# Altium PCB LCD_VGA.PcbDoc
Units mil, origin at the board's own origin, x right, y up, seen from the top; angles counter-clockwise.
Board outline 6000 x 4000 mil, 2 copper layers (Top Layer, Bottom Layer); 29 components, 38 nets, 119 pads, 103 vias.
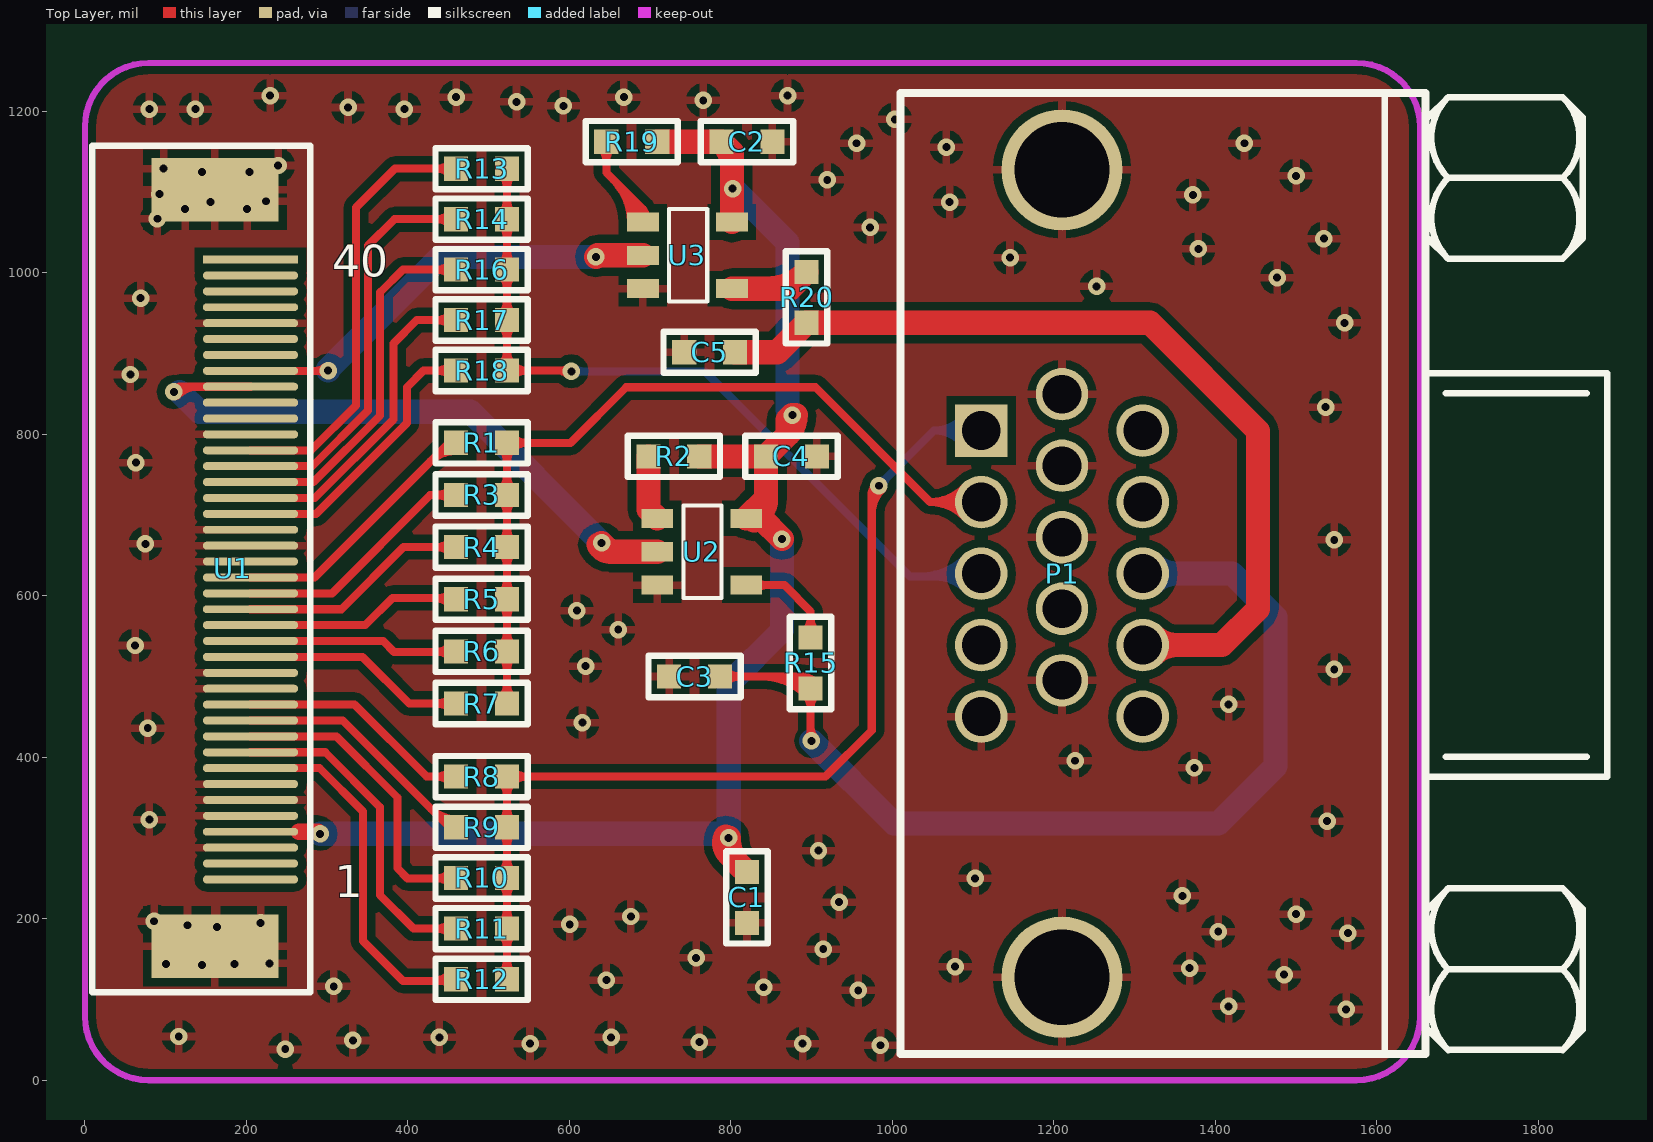
[diagram p0: Top Layer view]
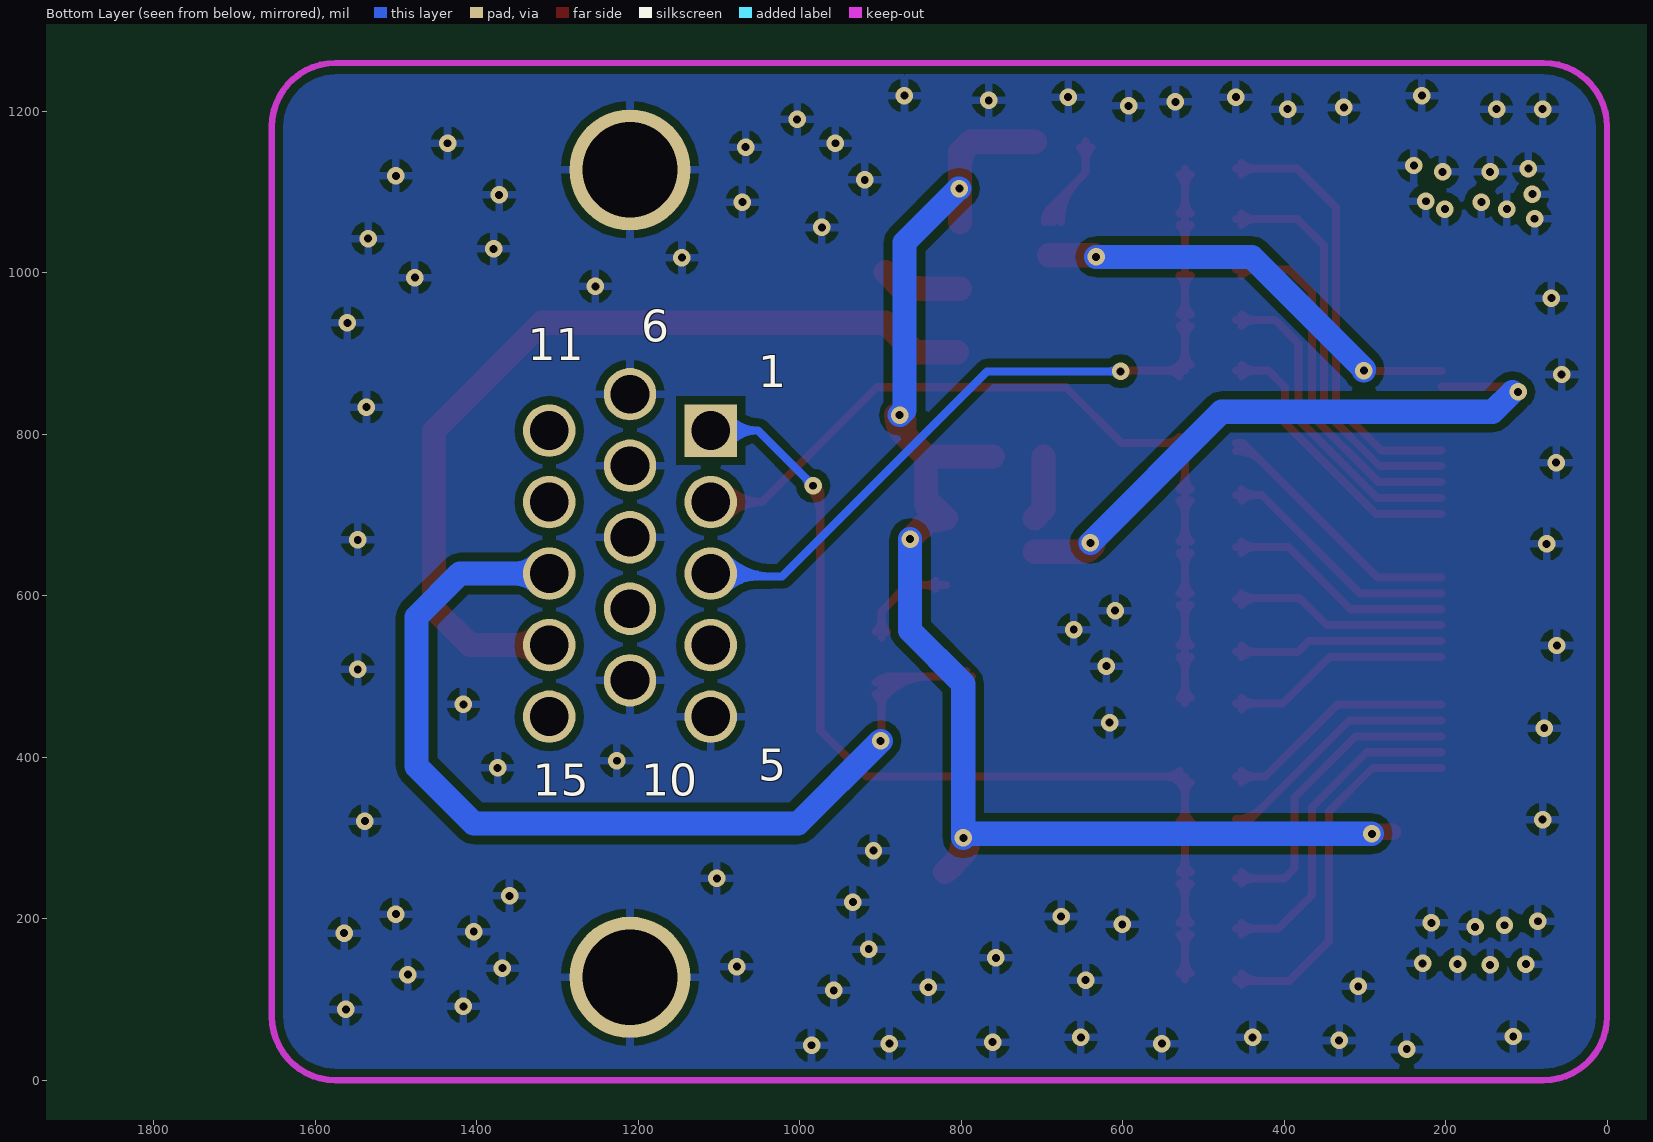
[diagram p1: Bottom Layer view, seen from below]

## Layer stack, top to bottom
Top Layer: signal copper 1.4
Dielectric: dielectric 12.6, FR-4, Dk 4.8
Bottom Layer: signal copper 1.4

## Board outline
-2274.76,-1366.34 3725.24,-1366.34 3725.24,2633.66 -2274.76,2633.66

## Design rules (kind name [scope] priority, off if disabled: settings)
Clearance [All] p1: gap=5
ComponentClearance [All] p1: gap=1 collisioncheckmode=3 verticalgap=1 showdistances=FALSE
HoleSize [All] p1: absolutevalues=TRUE maxlimit=196.85 minlimit=1 maxpercent=80.000 minpercent=20.000
HoleToHoleClearance [All] p1: gap=0 allowstackedmicrovias=TRUE
MinimumSolderMaskSliver [All] p1: minsoldermaskwidth=0
PolygonConnect [All] p1: connectstyle=Relief reliefconductorwidth=10 reliefentries=4 polygonreliefangle="90 Angle" airgapwidth=10
RoutingVias [All] p1: holewidth=9.84 width=21.65 viastyle="Through Hole" minholewidth=9.84 minwidth=21.65 maxholewidth=28 maxwidth=50
SilkToSilkClearance [All] p1: silktosilkclearance=0
SilkToSolderMaskClearance [IsPad] p1: minsilkscreentomaskgap=0 clearancetoexposedcopper=TRUE
SolderMaskExpansion [All] p1: expansion=4
Width [All] p1: maxlimit=100 minlimit=5 preferedwidth=5 minimp=50.000000 maximp=50.000000 favimp=50.000000
22 further rules are at their usual default settings.

## Components (designator, comment, footprint, x,y, rotation, side; value= is the part's Value field where it differs from the comment)
C1 "C10uF" 0603C 819.88,257.87 r270 top
C2 "104" 0603C 851.38,1162.4 r180 top
C3 "5PF" 0603C 786.42,500 r180 top
C4 "104" 0603C 906.5,772.64 r180 top
C5 "5PF" 0603C 805.12,901.57 r180 top
P1 "VGA" VGA-DB15 1110.04,804.65 r0 top locked
R1 "499R" 0603R 522.64,789.37 r180 top
R2 "8.06K" 0603R 760.83,772.64 r180 top
R3 "1K" 0603R 522.64,724.8 r180 top
R4 "2K" 0603R 522.64,660.24 r180 top
R5 "4.02K" 0603R 522.64,595.67 r180 top
R6 "8.06K" 0603R 522.64,531.1 r180 top
R7 "16K" 0603R 522.64,466.54 r180 top
R8 "499R" 0603R 522.64,375.98 r180 top
R9 "1K" 0603R 522.64,313.24 r180 top
R10 "2K" 0603R 522.64,250.49 r180 top
R11 "4.02K" 0603R 522.64,187.75 r180 top
R12 "8.06K" 0603R 522.64,125 r180 top
R13 "499R" 0603R 522.64,1128.86 r180 top
R14 "1K" 0603R 522.64,1066.38 r180 top
R15 "22R" 0603R 898.62,485.24 r90 top
R16 "2K" 0603R 522.64,1003.9 r180 top
R17 "4.02K" 0603R 522.64,941.42 r180 top
R18 "8.06K" 0603R 522.64,878.94 r180 top
R19 "8.06K" 0603R 708.66,1162.4 r180 top
R20 "22R" 0603R 893.7,937.99 r90 top
U1 "AT043TN24" FPC40-N 205,248.66 r180 top locked
U2 "74LVC1G126" SOT23-5 708.66,695.87 r270 top
U3 "74LVC1G126" SOT23-5 690.95,1062.99 r270 top

## Footprints (in the part's own frame and the unit in brackets; to place one, negate y for a bottom-side part, rotate by r counter-clockwise, add the part's x,y. Pads: shape width x height; smd on the part's side, far side on the other; paste and mask are expansions set on the pad)
0603C [mil]
  rect 30x30 smd: 1(0,0) 2(62.99,0)
  silkscreen extent -26,-26 89,26
0603R [mil]
  rect 30x30 smd: 1(0,0) 2(62.99,0)
  silkscreen extent -26,-26 89,26
FPC40-N [mm]
  rect 4x2 smd: 0(1.12,2.104) 0(1.12,-21.695)
  oval 3x0.25 smd: 1(0,0) 2(0,-0.5) 3(0,-1) 4(0,-1.5) 5(0,-2) 6(0,-2.5) 7(0,-3) 8(0,-3.5) 9(0,-4) 10(0,-4.5) 11(0,-5) 12(0,-5.5) 13(0,-6) 14(0,-6.5) 15(0,-7) 16(0,-7.5) 17(0,-8) 18(0,-8.5) 19(0,-9) 20(0,-9.5) 21(0,-10) 22(0,-10.5) 23(0,-11) 24(0,-11.5) 25(0,-12) 26(0,-12.5) 27(0,-13) 28(0,-13.5) 29(0,-14) 30(0,-14.5) 31(0,-15) 32(0,-15.5) 33(0,-16) 34(0,-16.5) 35(0,-17) 36(0,-17.5) 37(0,-18) 38(0,-18.5) 39(0,-19)
  rect 3x0.25 smd: 40(0,-19.5)
  silkscreen extent -1.88,-23.08 4.97,3.55
SOT23-5 [mm]
  rect 0.6x1 smd: 1(0,0) 2(1.05,0) 3(2.1,0) 4(2.1,2.8) 5(0,2.8)
  silkscreen extent -0.4,0.82 2.5,2.02
VGA-DB15 [mil]
  rect 65x65 hole 48: 1(0,0)
  round 65 hole 48: 2(0,-88.58) 3(0,-177.17) 4(0,-265.75) 5(0,-354.33) 6(100,45) 7(100,-43.58) 8(100,-132.17) 9(100,-220.75) 10(100,-309.33) 11(200,0) 12(200,-88.58) 13(200,-177.17) 14(200,-265.75) 15(200,-354.33)
  round 150 hole 118.11: 16(100,322.83) 17(100,-677.17)
  silkscreen extent -100,-772 775,419

## Part data
C1 C2 C3 C4 C5: library part C10uF-B
R1 R2 R3 R4 R5 R6 R7 R8 R9 R10 R11 R12 R13 R14 R15 R16 R17 R18 R19 R20: library part R1M
U2 U3: library part 74LVC1G17

## Via types
v1: diameter 21.65, hole 9.84, Top Layer to Bottom Layer, 103 vias

## Nets (pads, with @x,y where several pads share a name; then routed paths per layer and width w, separated by ;. In a path a pad name is that pad's centre, name@x,y a point inside that pad or via, vN(x,y) a via of type N, cw(c..) or ccw(c..) an arc to the next point about the centre after c; other vN are vias at no path point)
3V3: C1.1 C2.2 C4.2 R2.1 R19.1 U1.4 U2.5 U3.5 | length 2047.6
  Top Layer w20: 264.76,307.72 288.74,307.72 v1(291.34,305.12)
  Top Layer w30: R19.1 C2.2 ; R2.1 C4.2 ; v1@793.07,300.2 ccw(c830.52,300.2) 804.04,273.72 ; v1@793.46,301.96 ccw(c810.67,293.94) 797.24,280.51 ; U3.5 801.18,1149.61 C2.2 ; 801.18,1131.51 ccw(c757.5,1131.51) C2.2 ; U2.5@826.77,699.06 cw(c826.77,680.62) 839.81,693.65 ; U2.5@828.48,693.17 ccw(c811.19,720.47) 843.5,720.47 ; U2.5@829.03,693.61 ccw(c794.07,728.56) 843.5,728.56 ; v1(863.19,670.28) 837.6,695.87 U2.5 843.5,720.47 ; 869.88,799.02 ccw(c845.08,823.82) v1@880.16,823.82 ; v1(875.98,823.82) 870.08,817.91 870.08,799.21 ; v1@880.16,823.86 cw(c845.75,823.55) 870.08,799.21 ; 797.24,280.51 C1.1 cw(c848.12,300.2) v1(797.24,300.2) 797.24,280.51 ; 843.5,720.47 C4.2 ; C4.2 870.08,799.21
  Bottom Layer w30: v1(291.34,305.12) 792.32,305.12 v1(797.24,300.2) 797.24,491.14 863.19,557.09 v1(863.19,670.28) ; v1(802.17,1104.33) 803.15,1104.33 870.08,1037.4 870.08,829.72 v1(875.98,823.82)
BLUE: P1.3 R13.1 R14.1 R16.1 R17.1 R18.1 | length 1506.6
  Top Layer w10: R18.1@515.57,886.01 ccw(c498.5,903.08) 522.64,903.08 ccw(c546.78,903.08) 529.71,886.01 ccw(c546.78,903.08) 546.78,878.94 ccw(c546.78,854.8) R18.1@529.71,871.87 ; R17.1@515.57,934.35 cw(c498.5,917.28) 522.64,917.28 cw(c546.78,917.28) R17.1@529.71,934.35 ; R17.1@515.57,948.49 ccw(c498.5,965.56) 522.64,965.56 ccw(c546.78,965.56) R17.1@529.71,948.49 ; R16.1@515.57,996.83 cw(c498.5,979.76) 522.64,979.76 cw(c546.78,979.76) R16.1@529.71,996.83 ; R16.1@515.57,1010.97 ccw(c498.5,1028.04) 522.64,1028.04 ccw(c546.78,1028.04) R16.1@529.71,1010.97 ; R14.1@515.57,1059.31 cw(c498.5,1042.24) 522.64,1042.24 cw(c546.78,1042.24) R14.1@529.71,1059.31 ; R14.1@515.57,1073.45 ccw(c498.5,1090.52) 522.64,1090.52 ccw(c546.78,1090.52) R14.1@529.71,1073.45 ; R13.1@515.57,1121.79 cw(c498.5,1104.72) 522.64,1104.72 cw(c546.78,1104.72) R13.1@529.71,1121.79 ; R13.1 R14.1 R16.1 R17.1 R18.1 600.39,878.94 603.35,881.89 603.35,878.94 v1(602.36,877.95) ; 585.92,878.94 cw(c585.92,861.51) v1@598.24,873.83 ; 590.67,878.94 ccw(c590.67,889.64) v1@598.24,882.07
  Bottom Layer w10: v1(602.36,877.95) 767.72,877.95 1021.65,624.02 1106.58,624.02 P1.3 ; v1@606.48,873.83 cw(c616.43,863.89) 616.43,877.95 cw(c616.43,892.02) v1@606.48,882.07 ; 1035.28,624.02 ccw(c1035.28,702.24) P1.3@1090.59,646.93 ; 1052.01,624.02 cw(c1052.01,569.46) P1.3@1090.59,608.04 ; 1059.43,624.02 ccw(c1059.43,678.09) P1.3@1097.67,639.86 ; 1076.16,624.02 cw(c1076.16,593.6) P1.3@1097.67,615.11
GND: C1.2 C2.1 C3.2 C4.1 C5.2 P1.5 P1.6 P1.7 P1.8 P1.10 P1.16 P1.17 U1.0 U1.3 U1.5 U1.6 U1.7 U1.13 U1.14 U1.21 U1.22 U1.23 U1.29 U1.36 U2.3 U3.3
  other v1: 248.03,38.39 985.24,43.31 551.18,45.28 888.78,45.28 760.83,47.24 331.69,49.21 438.98,53.15 651.57,53.15 116.14,54.13 1562.01,87.6 1416.34,91.54 957.68,111.22 840.55,115.16 308.07,116.14 645.67,124.02 1485.24,130.91 1368.11,138.78 1077.76,140.75 144.68,142.72 100.39,143.7 185.04,143.7 228.35,144.69 756.89,151.57 914.37,162.4 1563.98,182.09 1403.54,184.06 163.39,189.96 126.97,191.93 600.39,192.91 217.52,194.88 85.63,196.85 676.18,202.76 1500,205.71 934.06,220.47 1359.25,228.35 1102.36,250 908.46,284.45 1538.39,320.87 79.72,322.83 1374.02,386.81 1226.38,395.67 77.76,436.02 616.14,442.91 1416.34,465.55 1547.24,508.86 620.08,512.8 62.01,538.39 660.43,558.07 609.25,581.69 74.8,664.37 1547.24,669.29 62.99,764.76 1536.42,833.66 56.1,874.02 1560.04,937.99 68.9,968.5 1252.95,983.27 1476.38,994.09 1145.67,1018.7 1378.94,1029.53 1534.45,1042.32 972.44,1056.1 89.57,1066.93 124.02,1078.74 200.79,1078.74 155.51,1087.6 1070.87,1087.6 224.41,1088.58 1372.05,1096.46 92.52,1097.44 919.29,1115.16 1500,1120.08 144.68,1125 203.74,1125 97.44,1128.94 239.17,1132.87 1066.93,1155.51 955.71,1160.43 1436.02,1160.43 1002.95,1189.96 79.72,1202.76 136.81,1202.76 395.67,1202.76 325.79,1204.72 592.52,1206.69 534.45,1211.61 765.75,1213.58 459.65,1217.52 667.32,1217.52 229.33,1219.49 870.08,1219.49
GREEN: P1.2 R1.1 R3.1 R4.1 R5.1 R6.1 R7.1 | length 1573.4
  Top Layer w10: R7.1@515.57,473.61 ccw(c498.5,490.68) 522.64,490.68 ccw(c546.78,490.68) R7.1@529.71,473.61 ; R6.1@515.57,524.03 cw(c498.5,506.96) 522.64,506.96 cw(c546.78,506.96) R6.1@529.71,524.03 ; R6.1@515.57,538.17 ccw(c498.5,555.24) 522.64,555.24 ccw(c546.78,555.24) R6.1@529.71,538.17 ; R5.1@515.57,588.6 cw(c498.5,571.53) 522.64,571.53 cw(c546.78,571.53) R5.1@529.71,588.6 ; R5.1@515.57,602.74 ccw(c498.5,619.81) 522.64,619.81 ccw(c546.78,619.81) R5.1@529.71,602.74 ; R4.1@515.57,653.17 cw(c498.5,636.09) 522.64,636.09 cw(c546.78,636.09) R4.1@529.71,653.17 ; R4.1@515.57,667.31 ccw(c498.5,684.38) 522.64,684.38 ccw(c546.78,684.38) R4.1@529.71,667.31 ; R3.1@515.57,717.73 cw(c498.5,700.66) 522.64,700.66 cw(c546.78,700.66) R3.1@529.71,717.73 ; R3.1@515.57,731.87 ccw(c498.5,748.95) 522.64,748.95 ccw(c546.78,748.95) R3.1@529.71,731.87 ; R1.1@515.57,782.3 cw(c498.5,765.23) 522.64,765.23 cw(c546.78,765.23) 529.71,782.3 cw(c546.78,765.23) 546.78,789.37 cw(c546.78,813.51) R1.1@529.71,796.44 ; R7.1 R6.1 R5.1 R4.1 R3.1 R1.1 601.38,789.37 670.28,858.27 904.53,858.27 1046.73,716.06 ; P1.2@1089.94,697.29 ccw(c1046.73,656.95) 1046.73,716.06 ; P1.2@1089.94,734.83 cw(c1046.73,775.18) 1046.73,716.06 ; P1.2@1097.25,704.12 ccw(c1069.75,678.44) 1069.75,716.06 ccw(c1069.75,753.68) P1.2@1097.25,728.01 ; P1.2 1046.73,716.06
LCD-B3: R18.2 U1.24 | length 392
  Top Layer w10: U1.24 286.06,701.42 398.62,813.98 398.62,858.27 419.29,878.94 R18.2 ; R18.2@452.58,871.87 ccw(c435.5,854.8) 435.5,878.94 ccw(c435.5,903.08) R18.2@452.58,886.01
LCD-B4: R17.2 U1.25 | length 438.9
  Top Layer w10: U1.25 284.53,721.1 381.89,818.46 381.89,912.4 410.91,941.42 R17.2 ; R17.2@452.58,934.35 ccw(c435.5,917.28) 435.5,941.42 ccw(c435.5,965.56) R17.2@452.58,948.49
LCD-B5: R16.2 U1.26 | length 490.9
  Top Layer w10: U1.26 283.01,740.79 365.63,823.41 365.63,975.87 393.66,1003.9 R16.2 ; R16.2@452.58,996.83 ccw(c435.5,979.76) 435.5,1003.9 ccw(c435.5,1028.04) R16.2@452.58,1010.97
LCD-B6: R14.2 U1.27 | length 538.8
  Top Layer w10: U1.27 281.48,760.47 350.63,829.62 350.63,1033.7 383.31,1066.38 R14.2 ; R14.2@452.58,1059.31 ccw(c435.5,1042.24) 435.5,1066.38 ccw(c435.5,1090.52) R14.2@452.58,1073.45
LCD-B7: R13.2 U1.28 | length 580.5
  Top Layer w10: U1.28 279.95,780.16 335.63,835.84 335.63,1080.71 383.86,1128.94 459.57,1128.94 R13.2 ; 435.31,1128.94 cw(c435.31,1104.53) R13.2@452.58,1121.79 ; 435.69,1128.94 ccw(c435.69,1152.81) R13.2@452.58,1135.93
LCD-DEN: U1.34
LCD-G2: R7.2 U1.15 | length 316.5
  Top Layer w10: U1.15 343.86,524.25 401.57,466.54 R7.2 ; R7.2@452.58,459.46 ccw(c435.5,442.39) 435.5,466.54 ccw(c435.5,490.68) R7.2@452.58,473.61
LCD-G3: R6.2 U1.16 | length 298.4
  Top Layer w10: U1.16 369.45,543.94 382.87,530.51 459.06,530.51 R6.2 ; 434.08,530.51 ccw(c434.08,556.67) R6.2@452.58,538.17 ; 436.93,530.51 cw(c436.93,508.39) R6.2@452.58,524.03
LCD-G4: R5.2 U1.17 | length 307.3
  Top Layer w10: U1.17 347.09,563.62 380.91,597.44 457.87,597.44 R5.2 ; 431.23,597.44 cw(c431.23,567.25) R5.2@452.58,588.6 ; 439.78,597.44 ccw(c439.78,615.54) R5.2@452.58,602.74
LCD-G5: R4.2 U1.18 | length 324.4
  Top Layer w10: U1.18 317.56,583.31 394.49,660.24 R4.2 ; R4.2@452.58,653.17 ccw(c435.5,636.09) 435.5,660.24 ccw(c435.5,684.38) R4.2@452.58,667.31
LCD-G6: R3.2 U1.19 | length 343
  Top Layer w10: U1.19 305.75,602.99 427.56,724.8 R3.2 ; R3.2@452.58,717.73 ccw(c435.5,700.66) 435.5,724.8 ccw(c435.5,748.95) R3.2@452.58,731.87
LCD-G7: R1.2 U1.20 | length 376.2
  Top Layer w10: U1.20 284.09,622.68 450.79,789.37 R1.2 ccw(c459.65,767.98) 444.52,783.11 ; 427.45,766.04 cw(c459.65,733.84) R1.2@459.65,779.37
LCD-HSYNC: U1.32 U2.2 | length 838.6
  Top Layer w10: v1(110.24,852.36) 116.77,858.9 U1.32 ; v1@114.36,848.24 cw(c140.08,822.52) 140.08,858.9
  Top Layer w30: v1@636.04,663.47 ccw(c650.59,670.84) 650.59,654.53 ; v1@636.81,662.4 ccw(c655.83,681.42) 655.83,654.53 ; v1(639.76,665.35) 650.59,654.53 ; U2.2 650.59,654.53
  Bottom Layer w30: v1@117.13,852.36 141.73,827.76 477.36,827.76 v1(639.76,665.35)
LCD-ONOFF: U1.31
LCD-PCLK: U1.30
LCD-R3: R12.2 U1.8 | length 496.5
  Top Layer w10: U1.8 290.71,386.46 344.49,332.68 344.49,172.24 393.7,123.03 457.68,123.03 R12.2 ; 430.75,123.03 ccw(c430.75,153.89) R12.2@452.58,132.07 ; 440.26,123.03 cw(c440.26,105.61) R12.2@452.58,117.93
LCD-R4: R11.2 U1.9 | length 447
  Top Layer w10: U1.9 297.6,406.14 365.16,338.58 365.16,229.33 406.74,187.75 R11.2 ; R11.2@452.58,180.67 ccw(c435.5,163.6) 435.5,187.75 ccw(c435.5,211.89) R11.2@452.58,194.82
LCD-R5: R10.2 U1.10 | length 416.9
  Top Layer w10: U1.10 311.38,425.83 386.81,350.39 386.81,262.8 399.61,250 459.15,250 R10.2 ; 434.32,250 ccw(c434.32,275.82) R10.2@452.58,257.56 ; 436.69,250 cw(c436.69,227.54) R10.2@452.58,243.42
LCD-R6: R9.2 U1.11 | length 343.8
  Top Layer w10: U1.11 319.25,445.51 451.53,313.24 R9.2 ; 428.71,336.05 ccw(c459.65,366.98) R9.2@459.65,323.24
LCD-R7: R8.2 U1.12 | length 329.5
  Top Layer w10: U1.12 334.02,465.2 423.23,375.98 R8.2 ; R8.2@452.58,368.91 ccw(c435.5,351.84) 435.5,375.98 ccw(c435.5,400.13) R8.2@452.58,383.05
LCD-VSYNC: U1.33 U3.2 | length 568.5
  Top Layer w10: U1.33 300.83,878.58 v1(301.18,878.94) ; 286.26,878.58 ccw(c286.26,893.86) v1@297.06,883.06 ; 287.97,878.58 cw(c287.97,865.73) v1@297.06,874.82
  Top Layer w30: v1(632.87,1019.69) 634.84,1021.65 U3.2
  Bottom Layer w30: v1(301.18,878.94) 301.18,880.91 439.96,1019.69 v1(632.87,1019.69)
LEDK(+): U1.2
LEDK(-): U1.1
NetR2_2: R2.2 U2.1 | length 81.3
  Top Layer w30: R2.2 697.84,706.69 U2.1
NetR15_2: R15.2 U2.4 | length 189.4
  Top Layer w10: U2.4 866.14,613.19 898.62,580.71 R15.2 ; U2.4@831.59,608.37 cw(c843.21,596.74) 843.21,613.19 cw(c843.21,629.63) U2.4@831.59,618 ; R15.2@891.55,555.3 ccw(c874.48,572.37) 898.62,572.37 ccw(c922.76,572.37) R15.2@905.69,555.3
NetR19_2: R19.2 U3.1 | length 296.5
  Top Layer w10: R19.2@638.6,1155.33 cw(c621.53,1138.26) 645.67,1138.26 cw(c669.81,1138.26) R19.2@652.74,1155.33 ; R19.2 645.67,1124.02 690.95,1078.74 ; 654.74,1114.94 cw(c602.79,1062.99) U3.1@676.26,1062.99 ; 671.81,1097.87 cw(c636.93,1062.99) U3.1@686.26,1062.99 ; U3.1@686.28,1067.96 ccw(c676.15,1078.74) 690.95,1078.74 ; 688.88,1080.8 cw(c671.07,1062.99) U3.1@696.26,1062.99 ; U3.1 690.95,1078.74 ; U3.1@695.61,1067.96 cw(c705.74,1078.74) 690.95,1078.74
NetR20_2: R20.2 U3.4 | length 156.5
  Top Layer w30: U3.4 873.03,980.31 R20.2 cw(c843.8,1050.89) 843.8,980.31
RED: P1.1 R8.1 R9.1 R10.1 R11.1 R12.1 | length 1754
  Top Layer w10: R12.1@515.57,132.07 ccw(c498.5,149.14) 522.64,149.14 ccw(c546.78,149.14) R12.1@529.71,132.07 ; R11.1@515.57,180.67 cw(c498.5,163.6) 522.64,163.6 cw(c546.78,163.6) R11.1@529.71,180.67 ; R11.1@515.57,194.82 ccw(c498.5,211.89) 522.64,211.89 ccw(c546.78,211.89) R11.1@529.71,194.82 ; R10.1@515.57,243.42 cw(c498.5,226.35) 522.64,226.35 cw(c546.78,226.35) R10.1@529.71,243.42 ; R10.1@515.57,257.56 ccw(c498.5,274.63) 522.64,274.63 ccw(c546.78,274.63) R10.1@529.71,257.56 ; R9.1@515.57,306.17 cw(c498.5,289.1) 522.64,289.1 cw(c546.78,289.1) R9.1@529.71,306.17 ; R9.1@515.57,320.31 ccw(c498.5,337.38) 522.64,337.38 ccw(c546.78,337.38) R9.1@529.71,320.31 ; R8.1@515.57,368.91 cw(c498.5,351.84) 522.64,351.84 cw(c546.78,351.84) 529.71,368.91 cw(c546.78,351.84) 546.78,375.98 cw(c546.78,400.13) R8.1@529.71,383.05 ; R12.1 R11.1 R10.1 R9.1 R8.1 917.32,375.98 974.41,433.07 974.41,727.36 ; 974.41,700.77 cw(c1018.72,700.77) v1@987.39,732.1 ; 974.41,724.91 cw(c994.58,724.91) v1@980.32,739.17 ; v1@977.46,735.72 cw(c966.95,734.82) 974.41,727.36 ; v1@982.77,730.41 ccw(c981.87,719.9) 974.41,727.36 ; v1(983.27,736.22) 974.41,727.36
  Bottom Layer w10: v1@983.27,742.05 ccw(c983.27,756.11) 993.21,746.17 ccw(c1003.16,736.22) v1@989.09,736.22 ; v1@987.2,740.16 1051.69,804.65 ; P1.1@1088.83,787.14 ccw(c1051.7,756.5) 1051.7,804.65 ; P1.1@1088.83,822.15 cw(c1051.7,852.79) 1051.7,804.65 ; P1.1@1096.54,793.51 ccw(c1072.91,774.01) 1072.91,804.65 ccw(c1072.91,835.28) P1.1@1096.54,815.78 ; P1.1 1051.69,804.65
TP-XL: U1.39
TP-XR: U1.37
TP-YD: U1.38
TP-YU: U1.40
VGA-HSYNC: C3.1 P1.13 R15.1 | length 1485
  Top Layer w10: C3.1 883.86,500 R15.1 ; C3.1@793.49,492.93 cw(c810.56,475.86) 810.56,500 cw(c810.56,524.14) C3.1@793.49,507.07 ; 838.84,500 cw(c838.84,425.45) 891.55,478.17 cw(c874.48,461.09) 898.62,461.09 cw(c922.76,461.09) R15.1@905.69,478.17 ; 862.98,500 cw(c862.98,449.59) R15.1 ; R15.1@887.12,500 cw(c887.12,473.74) R15.1@905.69,492.31 ; v1@895.49,424.4 ccw(c887.92,431.97) 898.62,431.97 ; 898.62,436.72 ccw(c916.05,436.72) v1@903.73,424.4 ; v1(899.61,420.28) 899.61,421.26 898.62,422.24 R15.1
  Bottom Layer w30: v1(899.61,420.28) 1001.97,317.91 1403.54,317.91 1474.41,388.78 1474.41,573.82 1420.75,627.48 P1.13 ; P1.13@1322.41,615.11 cw(c1352.29,585.23) 1352.29,627.48 cw(c1352.29,669.73) P1.13@1322.41,639.86
VGA-VSYNC: C5.1 P1.14 R20.1 | length 1166.3
  Top Layer w30: C5.1 857.28,901.57 R20.1 1318.9,937.99 1452.76,804.13 1452.76,583.66 1407.99,538.9 P1.14 ; P1.14@1322.41,526.52 cw(c1352.29,496.65) 1352.29,538.9 cw(c1352.29,581.15) P1.14@1322.41,551.27
pads on no net: P1.4 P1.9 P1.11 P1.12 P1.15 U1.35

## Polygon pours and split planes (outlines as drawn)
GND on Bottom Layer "Bottom Layer-No Net" (solid, remove dead copper, pour order 10): 0,1296.26 13.78,1282.48 2040.35,1282.48 2040.35,-135.83 2073.82,-169.29 2029.53,-125 -260.83,-125
GND on Top Layer "Bottom Layer-No Net" (solid, remove dead copper, pour order 12): -162.4,1346.46 2339.57,1346.46 2498.03,1187.99 2241.14,931.1 2241.14,-474.41 98.43,-474.41 -150.59,-225.39

## Keep-outs
Keep-Out Layer:
  lines w7.87: 984.25,0 1574.8,0 ccw(c1574.8,78.74) 1653.54,78.74 1653.54,1181.1 ccw(c1574.8,1181.1) 1574.8,1259.84 78.74,1259.84 ccw(c78.74,1181.1) 0,1181.1 0,78.74 ccw(c78.74,78.74) 78.74,0 1181.1,0

## Silkscreen, mask and mechanical layers (free items; w line width, h text height)
Top Overlay:
  text "40" at 306.1,995.08 h40
  text "1" at 309.06,226.38 h40
Bottom Overlay:
  text "6" at 1195.87,914.37 h40
  text "11" at 1336.61,891.73 h40
  text "1" at 1051.18,858.27 h40
  text "5" at 1051.18,371.06 h40
  text "10" at 1195.87,352.36 h40
  text "15" at 1330.71,352.36 h40